# Altium PCB D20.PcbDoc
Units mm, origin at the board's own origin, x right, y up, seen from the top; angles counter-clockwise.
Board outline 152.4 x 101.6 mm, 2 copper layers (Top Layer, Bottom Layer); 23 components, 34 nets, 124 pads, 0 vias.
Unrouted connection lines stored in the file: 1.
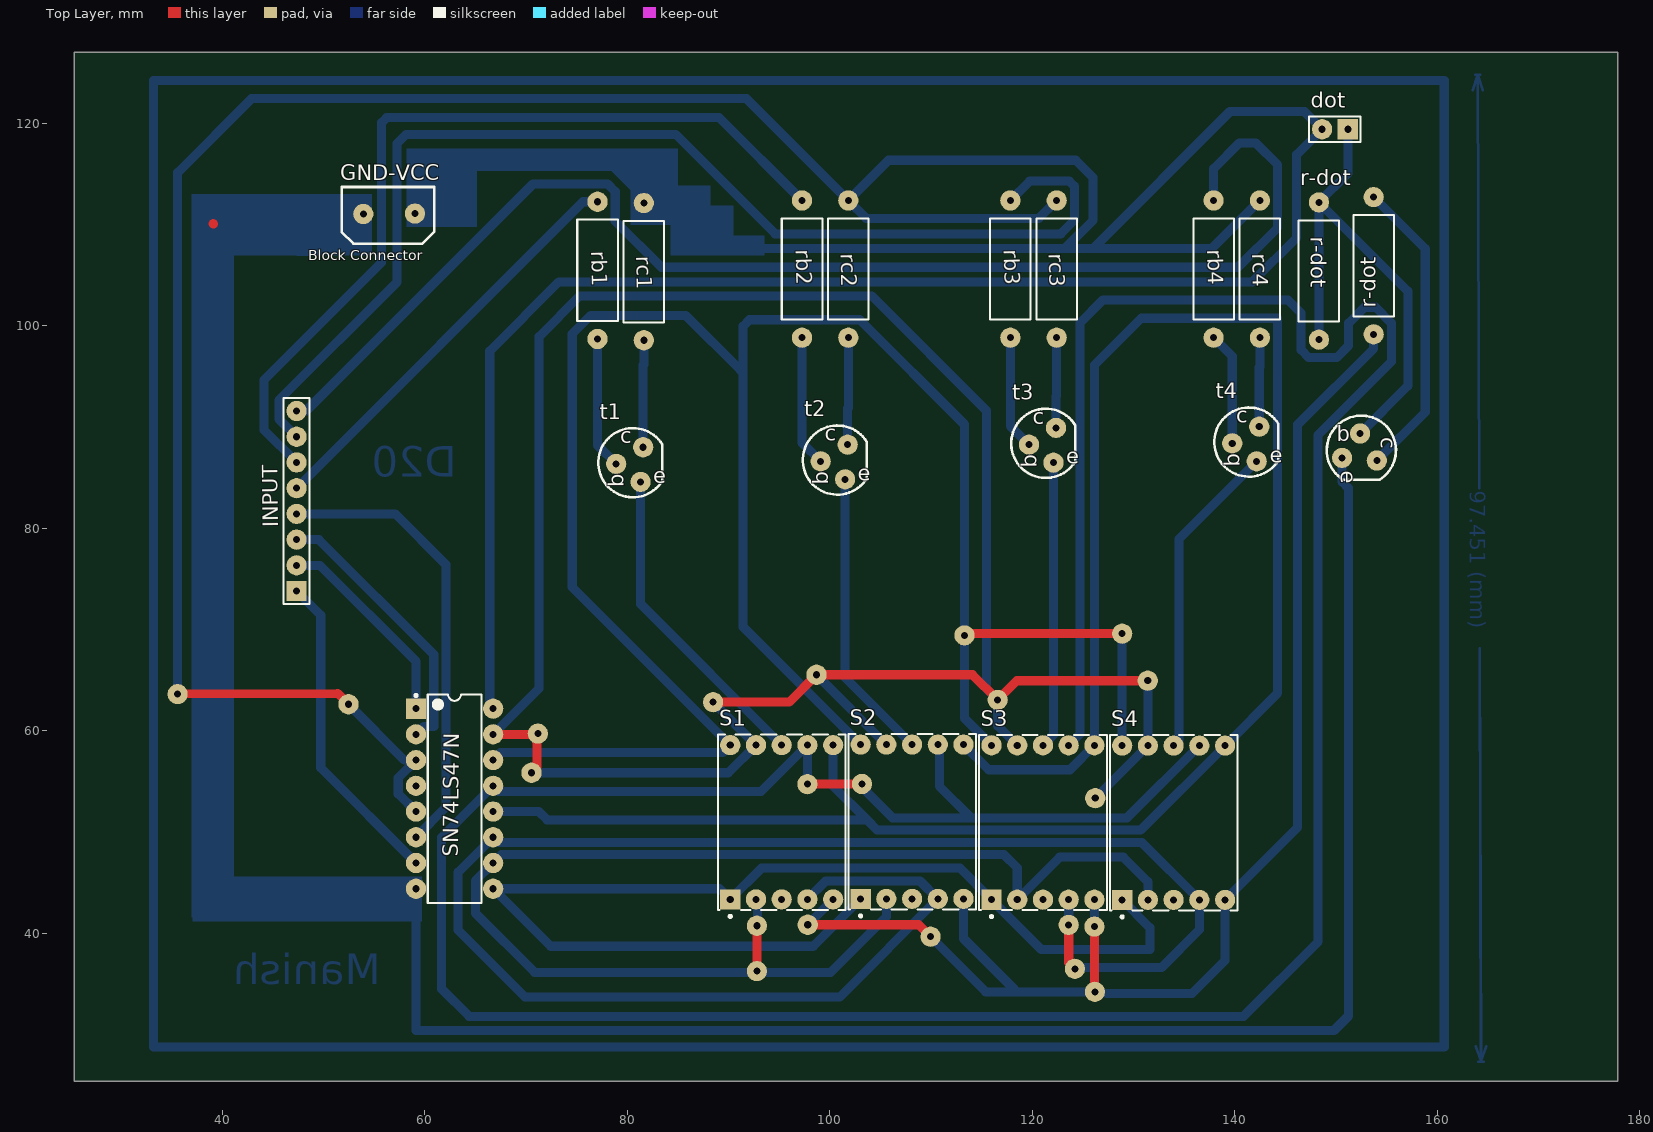
[diagram p0: Top Layer view]
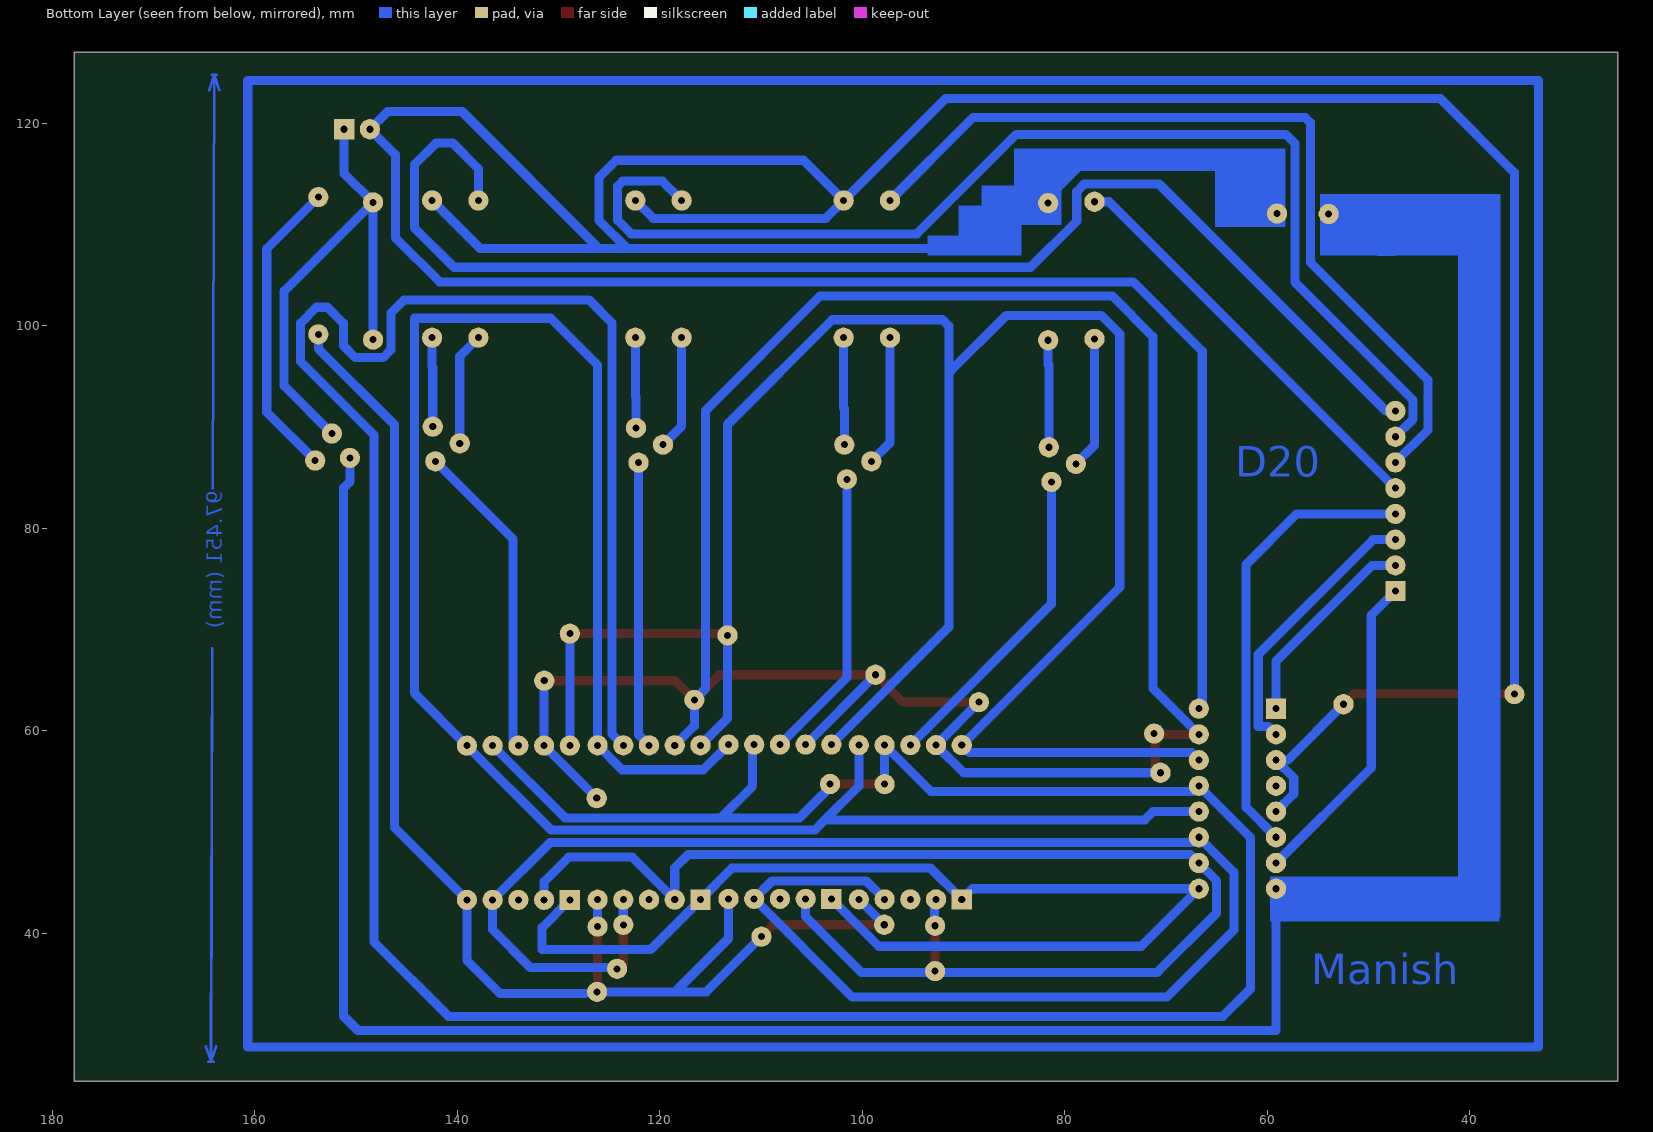
[diagram p1: Bottom Layer view, seen from below]

## Layer stack, top to bottom
Top Layer: signal copper 0.0356
Dielectric: dielectric 0.32, FR-4, Dk 4.8
Bottom Layer: signal copper 0.0356

## Board outline
25.4,25.4 177.8,25.4 177.8,127 25.4,127

## Design rules (kind name [scope] priority, off if disabled: settings)
Clearance [All] p1: gap=0.3
PolygonConnect [All] p1: connectstyle=Relief reliefconductorwidth=0.254 reliefentries=4 polygonreliefangle="90 Angle"
RoutingVias [All] p1: holewidth=0.711 width=1.27 viastyle="Through Hole" minholewidth=0.711 minwidth=1.27 maxholewidth=0.711 maxwidth=1.27
SilkscreenOverComponentPads [All] p1: minsilkscreentomaskgap=0.254
SolderMaskExpansion [All] p1: expansion=0.102
Width [All] p1: maxlimit=1 minlimit=0.8 preferedwidth=0.9 minimp=50.000000 maximp=50.000000 favimp=50.000000
27 further rules are at their usual default settings.

## Components (designator, comment, footprint, x,y, rotation, side; value= is the part's Value field where it differs from the comment)
dot "Comment" HDR1X2 151.15,119.4 r180 top
GND-VCC "Comment" "PCB Block Connector" 56.49,111.055 r0 top
INPUT "Comment" HDR1X8 47.35,73.8 r90 top
r-dot "Comment" RES13.55-10X4 148.3,105.4 r270 top
r-dot "Comment" RES13.55-10X4 153.7,105.925 r270 top
r-dot "Comment" "TO-92 Packaging" 152.3,88.025 r270 top
rb1 "Comment" RES13.55-10X4 77.064,105.467 r90 top
rb2 "Comment" RES13.55-10X4 97.257,105.594 r90 top
rb3 "Comment" RES13.55-10X4 117.831,105.594 r90 top
rb4 "Comment" RES13.55-10X4 137.897,105.594 r90 top
rc1 "Comment" RES13.55-10X4 81.636,105.34 r90 top
rc2 "Comment" RES13.55-10X4 101.829,105.594 r90 top
rc3 "Comment" RES13.55-10X4 122.403,105.594 r90 top
rc4 "Comment" RES13.55-10X4 142.469,105.594 r90 top
S1 "Comment" LEDDIP-10/14.27RHD 95.25,50.975 r0 top
S2 "Comment" LEDDIP-10/14.27RHD 108.125,51.025 r0 top
S3 "Comment" LEDDIP-10/14.27RHD 121.05,50.95 r0 top
S4 "Comment" LEDDIP-10/14.27RHD 133.95,50.925 r0 top
SN74LS47N "Comment" DIP-16 62.95,53.3 r0 top
t1 "Comment" "TO-92 Packaging" 80.239,86.29 r0 top
t2 "Comment" "TO-92 Packaging" 100.432,86.544 r0 top
t3 "Comment" "TO-92 Packaging" 121.006,88.195 r0 top
t4 "Comment" "TO-92 Packaging" 141.072,88.322 r0 top

## Footprints (in the part's own frame and the unit in brackets; to place one, negate y for a bottom-side part, rotate by r counter-clockwise, add the part's x,y. Pads: shape width x height; smd on the part's side, far side on the other; paste and mask are expansions set on the pad)
DIP-16 [mm] "DIP, 16-Pin, Row Spacing 7.62 mm, Pitch 2.54 mm"
  rect 2x2 hole 0.7: 1(-3.81,8.89)
  round 2 hole 0.7: 2(-3.81,6.35) 3(-3.81,3.81) 4(-3.81,1.27) 5(-3.81,-1.27) 6(-3.81,-3.81) 7(-3.81,-6.35) 8(-3.81,-8.89) 9(3.81,-8.89) 10(3.81,-6.35) 11(3.81,-3.81) 12(3.81,-1.27) 13(3.81,1.27) 14(3.81,3.81) 15(3.81,6.35) 16(3.81,8.89)
  silkscreen extent -3.93,-10.3 2.65,10.31, body extent -3.6,-10.28 3.6,10.28, height 5.08
HDR1X2 [mm]
  rect 2x2 hole 0.7: 1(0,0)
  round 2 hole 0.7: 2(2.54,0)
  silkscreen extent -1.27,-1.27 3.81,1.27
HDR1X8 [mm]
  rect 2x2 hole 0.7: 1(0,0)
  round 2 hole 0.7: 2(2.54,0) 3(5.08,0) 4(7.62,0) 5(10.16,0) 6(12.7,0) 7(15.24,0) 8(17.78,0)
  silkscreen extent -1.27,-1.27 19.05,1.27
LEDDIP-10/14.27RHD [mm] "LED, 7-Segment Display, 14.27 mm, RHD; 10 Leads; Row Space 15.24 mm; Pitch 2.54 mm"
  rect 2x2 hole 0.7: 1(-5.08,-7.62)
  round 2 hole 0.7: 2(-2.54,-7.62) 3(0,-7.62) 4(2.54,-7.62) 5(5.08,-7.62) 6(5.08,7.62) 7(2.54,7.62) 8(0,7.62) 9(-2.54,7.62) 10(-5.08,7.62)
  silkscreen extent -6.3,-9.42 6.3,8.65, body extent -6.3,-8.65 6.3,8.65, height 8.3
"PCB Block Connector" [mm]
  round 2 hole 0.7: 1(-2.547,-0.023) 2(2.547,0.023)
  silkscreen extent -4.7,-2.94 4.44,2.65
RES13.55-10X4 [mm] "Resistor, Axial; Body 10 x 4 mm (LxDia. max), Lead Dia. 0.65 mm (max)"
  round 2 hole 0.7: 1(-6.775,0) 2(6.775,0)
  silkscreen extent -5,-2 5,2
"TO-92 Packaging" [mm] "for 2N3904"
  round 2 hole 0.7: T(-1.333,0.063) T(1.08,-1.715) T(1.334,1.714)
  silkscreen extent -3.1,-3.23 3.22,3.61

## Free pads (board coordinates)
  round 2 hole 0.7: 0(123.59,40.835) 1(52.475,62.625) 1(126.13,40.67) 2(35.6,63.625) 2(128.87,69.595) 3(131.395,64.95) 4(113.3,69.425) 5(70.549,55.861) 6(71.175,59.725) 7(92.8,40.75) 8(92.8,36.275) 9(97.825,40.85) 11(109.95,39.675) 12(124.2,36.5) 13(126.175,34.225) 17(98.69,65.54) 18(88.475,62.83) 21(97.79,54.735) 22(103.175,54.75) 24(126.215,53.35) 27(116.575,63.05)

## Nets (pads, with @x,y where several pads share a name; then routed paths per layer and width w, separated by ;. In a path a pad name is that pad's centre, name@x,y a point inside that pad or via, vN(x,y) a via of type N, cw(c..) or ccw(c..) an arc to the next point about the centre after c; other vN are vias at no path point)
a: pad.21 pad.22 S1.7 S2.7 S3.7 S4.7 SN74LS47N.13 | length 347.9
  Top Layer w0.9: pad.21 pad.22@103.16,54.735
  Bottom Layer w0.9: pad.21 S1.7 93.22,54.025 67.305,54.025 SN74LS47N.13 61.675,49.485 61.675,34.509 64.384,31.8 140.848,31.8 148.225,39.177 148.225,89.225 155.457,96.457 155.457,100.26 153.892,101.825 152.797,101.825 151.232,100.26 151.232,98.05 150.038,96.856 147.295,96.856 146.533,97.618 146.533,101.251 145.234,102.55 126.979,102.55 124.689,100.26 124.689,59.669 S3.7 ; pad.22@102.95,54.65 106.206,51.394 113.971,51.394 ; S2.7@110.825,58.485 110.825,54.54 113.971,51.394 ; S4.7 129.339,51.394 113.971,51.394
A0: INPUT.1 SN74LS47N.7 | length 31.7
  Bottom Layer w0.9: INPUT.1 49.734,71.416 49.734,56.356 SN74LS47N.7
A1: INPUT.2 SN74LS47N.1 | length 20.4
  Bottom Layer w0.9: INPUT.2 49.651,76.34 59.14,66.851 SN74LS47N.1
A2: INPUT.3 SN74LS47N.2 | length 27.4
  Bottom Layer w0.9: INPUT.3 49.549,78.88 60.89,67.539 60.89,60.433 59.923,60.433 SN74LS47N.2
A3: INPUT.4 SN74LS47N.6 | length 45
  Bottom Layer w0.9: INPUT.4 57.093,81.42 62.09,76.423 62.09,52.44 SN74LS47N.6
b: S1.6 S2.6 S3.6 S4.6 SN74LS47N.12 | length 202.1
  Bottom Layer w0.9: SN74LS47N.12 71.263,52.03 72.093,51.2 103.67,51.2 ; S1.6 100.33,54.54 103.67,51.2 ; S2.6 115.691,56.159 123.719,56.159 S3.6 126.13,96.111 130.762,100.743 144.222,100.743 144.222,63.737 S4.6 130.679,50.194 104.676,50.194 103.67,51.2
b1: rb1.1 t1.T@78.906,86.354 | length 13.1
  Bottom Layer w0.9: rb1.1 77.064,88.195 t1.T@78.906,86.354
b2: rb2.1 t2.T@99.099,86.608 | length 13
  Bottom Layer w0.9: rb2.1 97.257,88.449 t2.T@99.099,86.608
b3: rb3.1 t3.T@119.673,88.259 | length 11.3
  Bottom Layer w0.9: rb3.1 117.831,90.1 t3.T@119.673,88.259
b4: rb4.1 t4.T@139.739,88.386 | length 11.2
  Bottom Layer w0.9: rb4.1 139.739,96.978 t4.T@139.739,88.386
b5: dot.1 r-dot.1@148.3,112.175 r-dot.2@148.3,98.625 r-dot.T@152.363,89.358 | length 50.4
  Bottom Layer w0.9: r-dot.2@148.3,98.625 r-dot.1@148.3,112.175 ; dot.1 151.15,115.025 r-dot.1@148.3,112.175 ; r-dot.T@152.363,89.358 157.075,94.07 157.075,103.4 r-dot.1@148.3,112.175
c: pad.0 pad.12 S1.4 S2.4 S3.4 S4.4 SN74LS47N.11 | length 174.9
  Top Layer w0.9: pad.0 123.59,37.11 pad.12
  Bottom Layer w0.9: S1.4 99.602,45.167 108.903,45.167 S2.4 100.972,33.712 69.913,33.712 63.3,40.325 63.3,46.03 SN74LS47N.11 67.275,48.975 130.82,48.975 S4.4 136.49,40.365 132.75,36.625 pad.12@124.55,36.625 ; pad.0 S3.4
c1: rc1.1 t1.T@81.573,88.005 | length 10.6
  Bottom Layer w0.9: t1.T@81.573,88.005 81.573,96.126 81.636,96.189 rc1.1
c2: rc2.1 t2.T@101.766,88.259 | length 10.6
  Bottom Layer w0.9: t2.T@101.766,88.259 101.766,91.84 101.829,91.903 rc2.1
c3: rc3.1 t3.T@122.34,89.91 | length 8.9
  Bottom Layer w0.9: t3.T@122.34,89.91 122.34,93.002 122.403,93.066 rc3.1
c4: rc4.1 t4.T@142.406,90.037 | length 8.8
  Bottom Layer w0.9: t4.T@142.406,90.037 142.406,95.869 142.469,95.933 rc4.1
c5: r-dot.1@153.7,112.7 r-dot.T@154.014,86.691 | length 30.1
  Bottom Layer w0.9: r-dot.1@153.7,112.7 158.8,107.6 158.8,91.477 r-dot.T@154.014,86.691
CA1: S1.8 t1.T@81.319,84.576 | length 31.8
  Bottom Layer w0.9: t1.T@81.319,84.576 81.319,72.527 S1.8
CA2: S2.8 t2.T@101.512,84.83 | length 28.9
  Bottom Layer w0.9: t2.T@101.512,84.83 101.512,65.258 S2.8
CA3: S3.8 t3.T@122.086,86.481 | length 28.3
  Bottom Layer w0.9: S3.8 122.086,59.606 t3.T@122.086,86.481
CA4: S4.8 t4.T@142.152,86.608 | length 31.5
  Bottom Layer w0.9: S4.8 134.475,59.07 134.475,78.931 t4.T@142.152,86.608
d: pad.7 pad.8 S1.2 S2.2 S3.2 S4.2 SN74LS47N.10 | length 133.4
  Top Layer w0.9: pad.8 pad.7
  Bottom Layer w0.9: S1.2 92.85,43.495 92.85,40.8 pad.7 ; S2.2 105.585,41.659 100.076,36.15 70.862,36.15 64.999,42.013 64.999,45.189 SN74LS47N.10 67.585,47.775 117.198,47.775 118.51,46.463 S3.2 122.705,47.525 128.981,47.525 131.41,45.096 S4.2
D1: INPUT.5 rb1.2 | length 41.4
  Bottom Layer w0.9: INPUT.5 75.632,112.242 rb1.2
D2: INPUT.6 rb2.2 | length 84.8
  Bottom Layer w0.9: INPUT.6 44.15,89.7 44.15,94.65 55.75,106.25 55.75,120.05 56.25,120.55 89.076,120.55 rb2.2
D3: INPUT.7 rb3.2 | length 117.1
  Bottom Layer w0.9: INPUT.7 45.6,90.79 45.6,92.64 57.277,104.317 57.277,118.002 58.175,118.9 84.775,118.9 94.601,109.074 122.809,109.074 124.156,110.42 124.156,113.773 123.648,114.281 119.743,114.281 rb3.2
D4: INPUT.8 rb4.2 | length 130.5
  Bottom Layer w0.9: INPUT.8 48.28,91.58 70.692,113.992 78.062,113.992 78.817,113.237 78.817,110.333 83.378,105.772 140.31,105.772 144.222,109.683 144.222,115.881 142.063,118.04 140.437,118.04 137.897,115.5 rb4.2
dot: pad.1@126.13,40.67 pad.9 pad.11 pad.13 r-dot.2@153.7,99.15 S1.5 S2.5 S3.5 S4.5 | length 137.2
  Top Layer w0.9: pad.9 108.775,40.85 pad.11 ; pad.13@126.13,34.27 pad.1@126.13,40.67
  Bottom Layer w0.9: pad.9@97.425,40.85 pad.9 S1.5 ; pad.11 115.4,34.225 pad.13 127.35,34.05 135.75,34.05 139.03,37.33 S4.5 146.2,50.475 146.2,90.243 153.7,97.743 r-dot.2@153.7,99.15 ; S2.5 113.205,39.495 118.237,34.462 ; pad.1@126.13,40.67 S3.5
dot-c: 
e: S1.1 S2.1 S3.1 S4.1 SN74LS47N.9 | length 116.5
  Bottom Layer w0.9: S2.1 98.365,38.725 72.445,38.725 SN74LS47N.9 89.115,44.41 S1.1 93.252,46.437 112.863,46.437 S3.1 120.9,38.4 131.6,38.4 131.6,40.575 S4.1
e5: 
f: pad.3 pad.5 pad.6 pad.17 pad.18 pad.24 pad.27 S1.9 S2.9 S3.9 S4.9 SN74LS47N.15 | length 232.7
  Top Layer w0.9: SN74LS47N.15 71.1,59.65 pad.5@71.1,56.412 ; pad.18 95.98,62.83 pad.17 114.085,65.54 pad.27 118.475,64.95 pad.3
  Bottom Layer w0.9: SN74LS47N.15 71.3,64.19 71.3,98.928 75.324,102.952 104.123,102.952 115.475,91.6 115.475,64.15 pad.27 116.575,60.505 S3.9 ; pad.5 89.976,55.861 S1.9 pad.18 ; pad.17 S2.9 ; pad.24@125.865,53 pad.24 S4.9 131.41,64.965 pad.3
g: pad.2@128.87,69.595 pad.4 S1.10 S2.10 S3.10 S4.10 SN74LS47N.14 | length 222.5
  Top Layer w0.9: pad.4@113.47,69.595 pad.2@128.87,69.595
  Bottom Layer w0.9: SN74LS47N.14 67.5,57.85 89.425,57.85 S1.10 74.575,74.19 74.575,99.196 76.404,101.025 85.75,101.025 91.188,95.588 ; S2.10 91.44,70.25 91.44,99.955 92.075,100.59 102.96,100.59 113.3,90.25 113.3,61.24 S3.10 ; S4.10 pad.2@128.87,69.595
GND: GND-VCC.1 r-dot.T@150.585,86.945 SN74LS47N.8 | length 215.6
  Top Layer w0.9: 39.125,110.075 39.15,110.05
  Bottom Layer w0.9: 38.275,63.075 38.275,102.775 40.7,105.2 ; 45.875,110.05 49.907,111.032 GND-VCC.1 ; 56.94,44.41 SN74LS47N.8 59.14,30.41 149.784,30.41 151.219,31.845 151.219,83.96 150.585,84.594 r-dot.T@150.585,86.945
VCC: dot.2 GND-VCC.2 pad.1@52.475,62.625 pad.2@35.6,63.625 rc1.2 rc2.2 rc3.2 rc4.2 SN74LS47N.3 SN74LS47N.5 SN74LS47N.16 | length 459.1
  Top Layer w0.9: pad.2@35.6,63.625 51.4,63.7 pad.1@52.475,62.625
  Bottom Layer w0.9: pad.2@35.6,63.625 35.6,115.125 42.9,122.425 91.773,122.425 rc2.2 ; pad.1@52.475,62.625 57.99,57.11 SN74LS47N.3 57.39,55.36 57.39,53.78 SN74LS47N.5 ; 64.009,116.05 78.3,116.05 81.636,112.714 rc1.2 85.91,112.115 90.399,107.626 123.202,107.626 ; SN74LS47N.16 66.425,62.525 66.425,97.495 73.254,104.324 141.732,104.324 146.101,108.693 146.101,116.891 dot.2 146.86,121.15 139.52,121.15 125.996,107.626 ; rc3.2 120.632,110.598 103.6,110.598 rc2.2 ; rc4.2 137.726,107.626 125.996,107.626 ; rc2.2 105.798,116.338 124.287,116.338 125.996,114.629 125.996,110.42 123.202,107.626 ; 123.202,107.626 125.996,107.626
pads on no net: S1.3 S2.3 S3.3 S4.3 SN74LS47N.4
copper on no net: | length 534.8
  Bottom Layer w0.254: 163.474,123.259 163.977,124.785 ; 163.723,124.784 164.231,124.786 ; 163.789,28.857 164.302,27.335 ; 164.048,27.334 164.556,27.336 ; 164.113,83.957 163.977,124.785 ; 164.166,68.163 164.302,27.335 ; 164.49,123.263 163.977,124.785 ; 164.805,28.861 164.302,27.335
  Bottom Layer w0.9: 33.225,28.775 160.675,28.775 160.675,124.2 33.225,124.2 33.225,28.775

## Other copper
Bottom Layer:
  rectangle net VCC: 79.95,113.925 83.875,117.05
  rectangle net VCC: 83.175,111.7 88.225,113.85
  rectangle net VCC: 80.925,109.95 85,117.5
  rectangle net VCC: 84.25,106.95 90.5,111.875
  rectangle net GND: 37.075,41.175 59.75,45.6
  rectangle net GND: 36.95,41.55 41.175,113
  rectangle net VCC: 65.15,115.275 79.025,116.05
  rectangle net VCC: 61.45,109.725 63.825,114.225
  rectangle net VCC: 61.15,110.6 63.65,116.15
  rectangle net VCC: 62.825,109.725 65.175,116.825
  rectangle net VCC: 64.9,115.875 77.6,117.5
  rectangle net VCC: 58.2,109.725 61.825,117.5
  rectangle net GND: 39.775,106.925 54.8,113
  rectangle net GND: 47.35,106.875 49.15,111.425
  rectangle net GND: 44,106.925 54.625,108.1
  rectangle net VCC: 78.775,115.625 80.75,116
  rectangle net VCC: 80.325,109.95 81.8,114.525
  rectangle net VCC: 79.325,115 80.225,115.875
  rectangle net VCC: 90.05,106.95 93.55,108.925
  rectangle net VCC: 61.825,115.7 68.15,117.5
  rectangle net VCC: 77.6,115.925 84.975,117.5
  text "D20" at 63.175,85.075 h3
  text "97.451 (mm)" at 163.2,83.7 h1.52 r270.19
  text "Manish" at 55.675,34.975 h3

## Text inside footprints (layer, text, board x,y; h text height)
GND-VCC: Top Overlay "Block Connector" at 48.489,106.483 h1.02
r-dot: Top Overlay "b" at 150.078,88.597 h1.52; Top Overlay "e" at 150.459,85.676 h1.5 r270; Top Overlay "c" at 154.396,88.978 h1.5 r270
t1: Top Overlay "b" at 79.668,84.068 h1.52 r90; Top Overlay "e" at 82.589,84.449 h1.5; Top Overlay "c" at 79.287,88.386 h1.5
t2: Top Overlay "b" at 99.861,84.322 h1.52 r90; Top Overlay "e" at 102.782,84.703 h1.5; Top Overlay "c" at 99.48,88.64 h1.5
t3: Top Overlay "b" at 120.435,85.973 h1.52 r90; Top Overlay "e" at 123.356,86.354 h1.5; Top Overlay "c" at 120.054,90.291 h1.5
t4: Top Overlay "b" at 140.501,86.1 h1.52 r90; Top Overlay "e" at 143.422,86.481 h1.5; Top Overlay "c" at 140.12,90.418 h1.5